# Altium PCB PCB1.PcbDoc
Units mm, origin at the board's own origin, x right, y up, seen from the top; angles counter-clockwise.
Board outline 70 x 56 mm, 2 copper layers (Top Layer, Bottom Layer); 141 components, 90 nets, 390 pads, 43 vias.
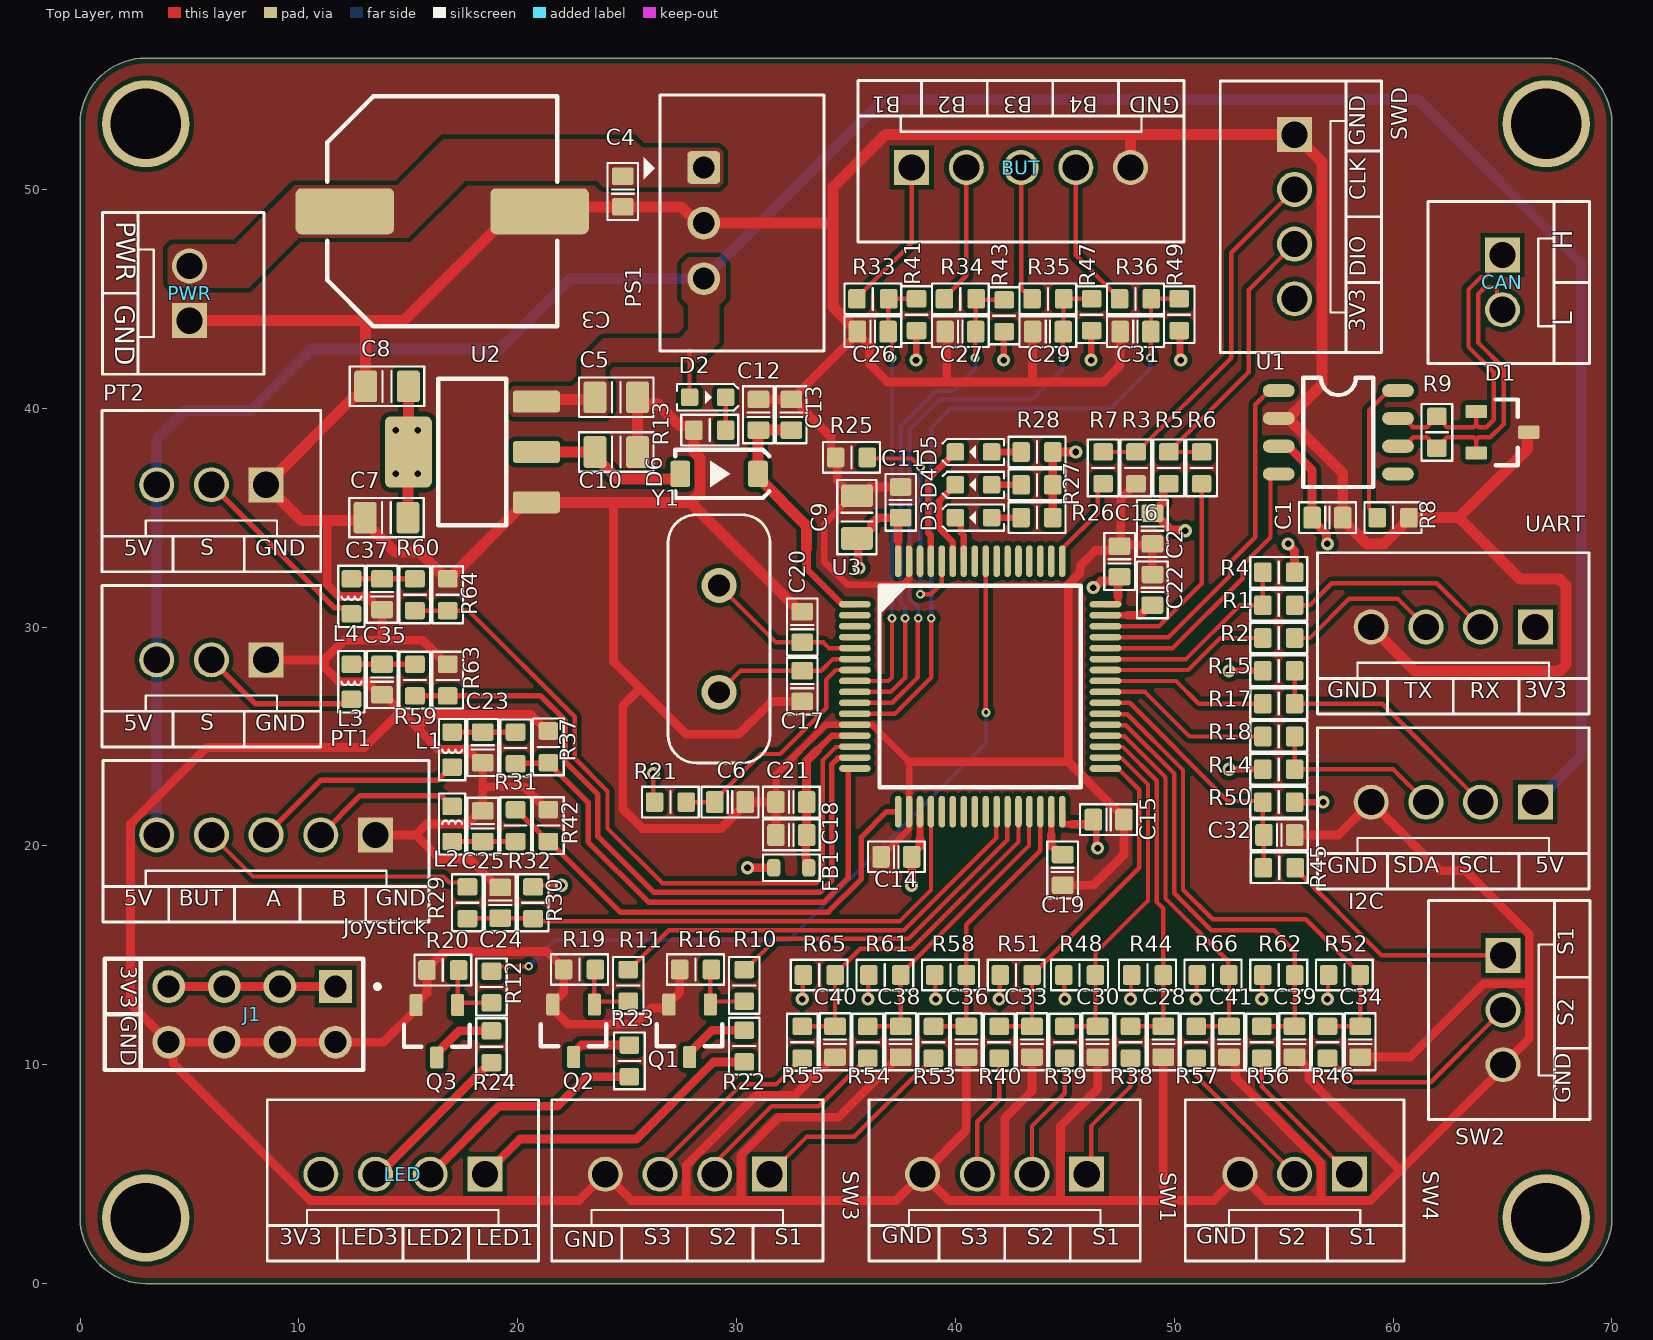
[diagram p0: Top Layer view]
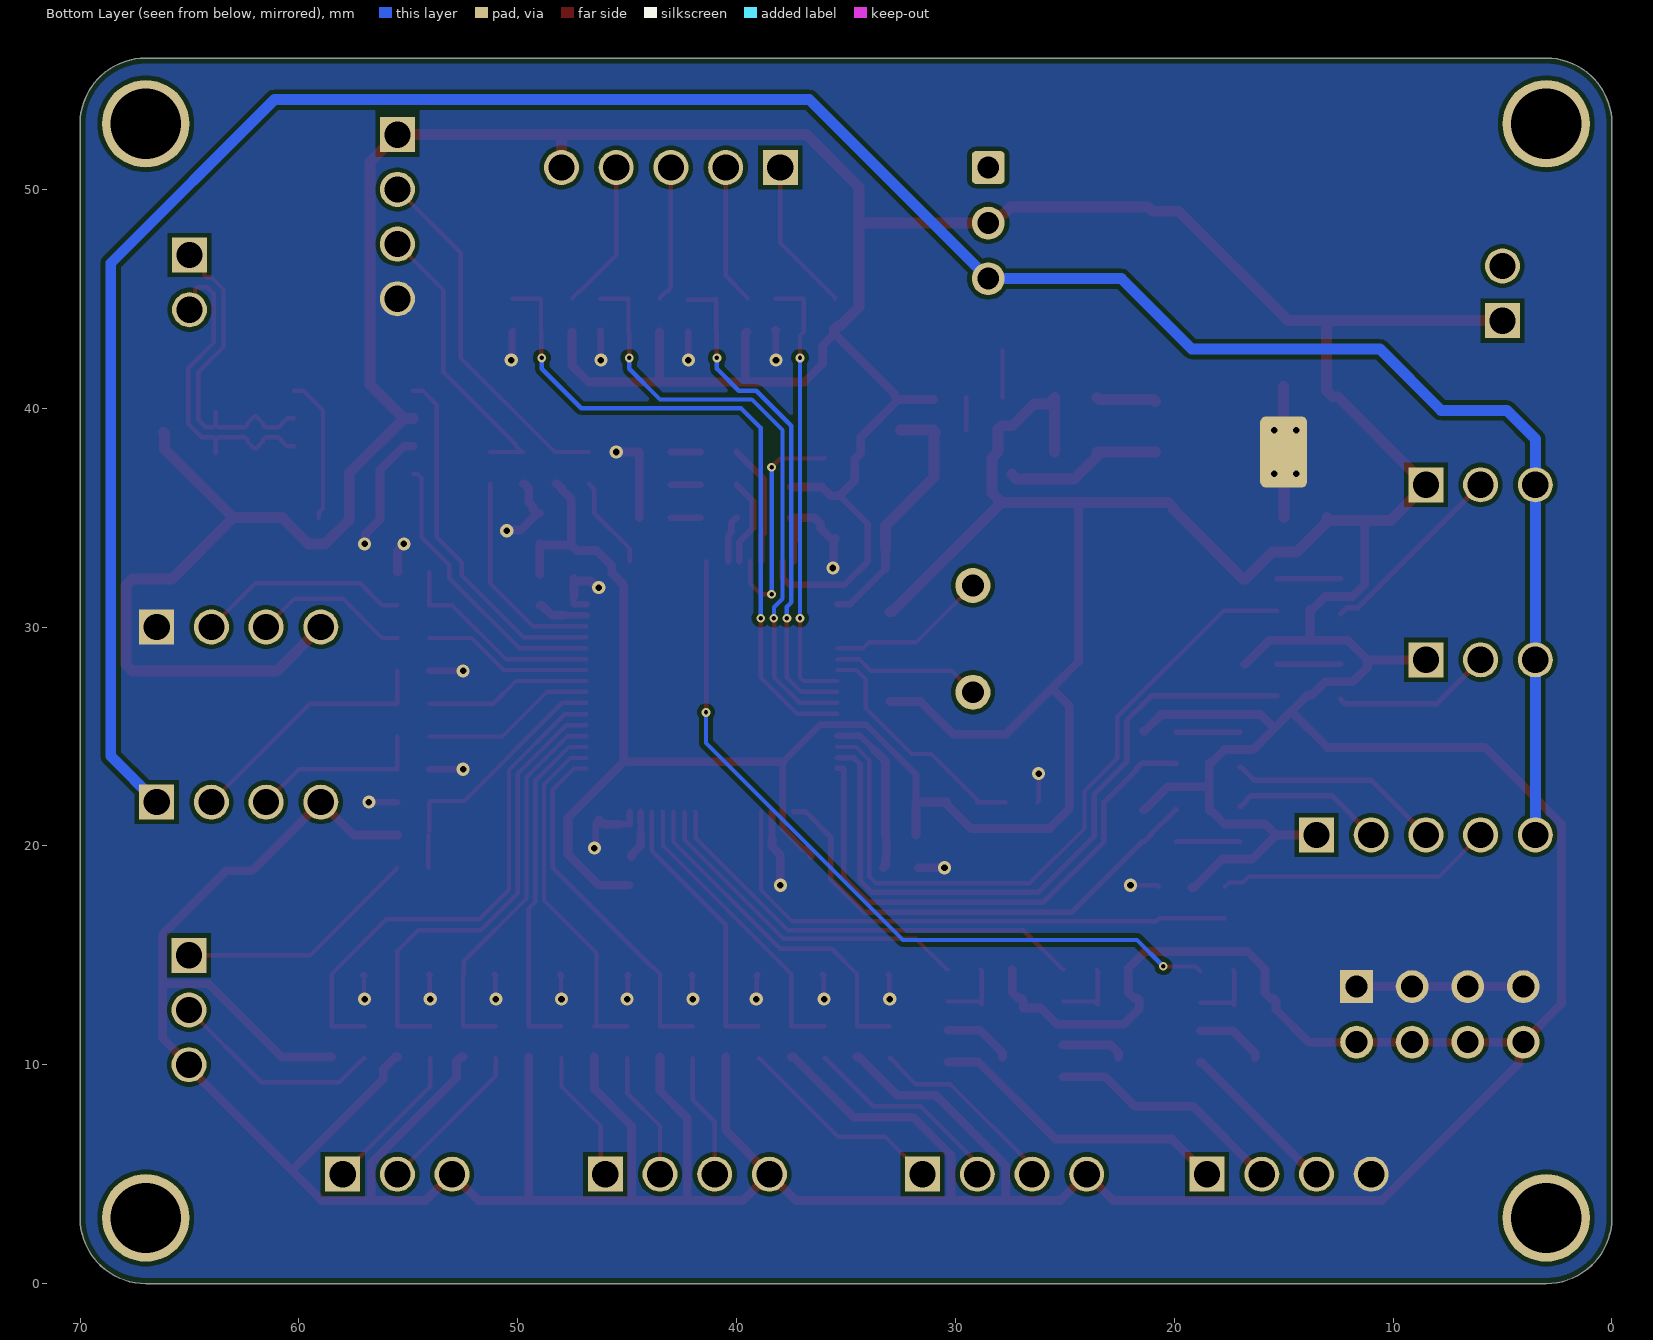
[diagram p1: Bottom Layer view, seen from below]
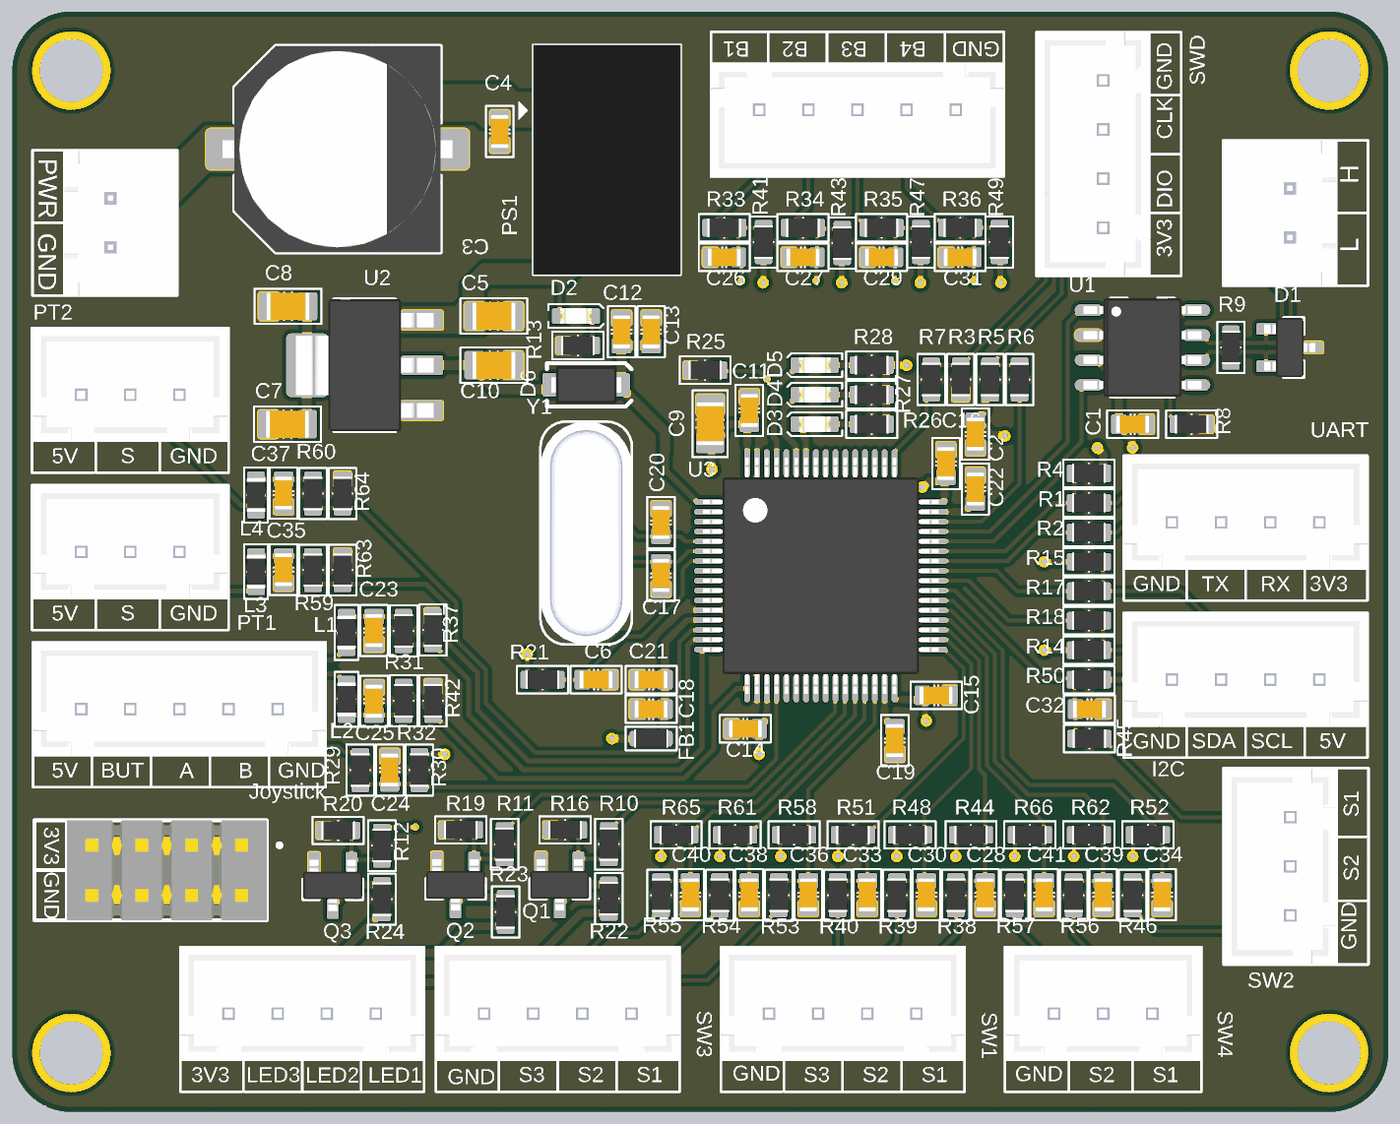
[diagram p2: 3D render of the assembled board from above, using the file's embedded part models]

## Layer stack, top to bottom
Top Solder: solder mask 0.0102, Solder Resist, Dk 3.5
Top Layer: signal copper 0.0356
Dielectric 1: dielectric 0.32, FR-4, Dk 4.8
Bottom Layer: signal copper 0.0356
Bottom Solder: solder mask 0.0102, Solder Resist, Dk 3.5

## Board outline
0,3 0,53 cw(c3,53) 3,56 67,56 cw(c67,53) 70,53 70,3 cw(c67,3) 67,0 3,0 cw(c3,3)

## Design rules (kind name [scope] priority, off if disabled: settings)
AcuteAngle [All] p1: minimum=3.50000000000000E+0001 checktracksonly=FALSE
BoardOutlineClearance "BoardOutlineClearance 1" [All] p1: gap=0.25 ignorepadtopadclearanceinfootprint=FALSE except(0: Arc-SplitContinuation Track-SplitContinuation SMDPad-SplitContinuation THPad-SplitContinuation Via-SplitContinuation Fill-SplitContinuation Poly-SplitContinuation Region-SplitContinuation Text-SplitContinuation) // Milling
BoardOutlineClearance "BoardOutlineClearance 2" [All] p2: gap=0.4 ignorepadtopadclearanceinfootprint=FALSE except(0: Arc-SplitContinuation Track-SplitContinuation SMDPad-SplitContinuation THPad-SplitContinuation Via-SplitContinuation Fill-SplitContinuation Poly-SplitContinuation Region-SplitContinuation Text-SplitContinuation) // V-Cut
Clearance "Clearance-1 1 Oz" [All] p1: gap=0.2 ignorepadtopadclearanceinfootprint=FALSE except(0.25: Arc-Hole Track-Hole SMDPad-Hole THPad-Hole Via-Hole Fill-Hole Poly-Hole Region-Hole Text-Hole) // Standart
Clearance "Clearance 3 Oz" [All] p2: gap=0.35 ignorepadtopadclearanceinfootprint=FALSE except(0.25: Arc-Hole Track-Hole SMDPad-Hole THPad-Hole Via-Hole Fill-Hole Poly-Hole Region-Hole Text-Hole)
Clearance "Clearance 2 Oz" [All] p3: gap=0.3 ignorepadtopadclearanceinfootprint=FALSE except(0.25: Arc-Hole Track-Hole SMDPad-Hole THPad-Hole Via-Hole Fill-Hole Poly-Hole Region-Hole Text-Hole)
Clearance "Clearance-2 1 Oz" [All] p4: gap=0.15 ignorepadtopadclearanceinfootprint=FALSE except(0.2: Arc-Fill Arc-Poly Track-Fill Track-Poly SMDPad-Fill SMDPad-Poly THPad-Fill THPad-Poly Via-Fill Via-Poly Fill-Fill Fill-Poly Poly-Poly; 0.25: Arc-Hole Track-Hole SMDPad-Hole THPad-Hole Via-Hole Fill-Hole Poly-Hole Region-Hole Text-Hole) // Advance
Clearance "Clearance-1 1/2 Oz" [All] p5: gap=0.125 ignorepadtopadclearanceinfootprint=FALSE except(0.2: Arc-Fill Arc-Poly Track-Fill Track-Poly SMDPad-SMDPad SMDPad-Fill SMDPad-Poly THPad-Fill THPad-Poly Via-Fill Via-Poly Fill-Fill Fill-Poly Poly-Poly Poly-Region Poly-Text; 0.25: Arc-Hole Track-Hole SMDPad-Hole THPad-Hole Via-Hole Fill-Hole Poly-Hole Region-Hole Text-Hole) // Standart
Clearance "Clearance-2 1/2 Oz" [All] p6: gap=0.1 ignorepadtopadclearanceinfootprint=FALSE except(0.15: Arc-Fill Arc-Poly Track-Fill Track-Poly SMDPad-SMDPad SMDPad-Fill SMDPad-Poly THPad-Fill THPad-Poly Via-Fill Via-Poly Fill-Fill Fill-Poly Poly-Poly Poly-Region Poly-Text; 0.25: Arc-Hole Track-Hole SMDPad-Hole THPad-Hole Via-Hole Fill-Hole Poly-Hole Region-Hole Text-Hole) // Advance
DiffPairsRouting "DiffPairsRouting 1 Oz" [All] p1: maxlimit=0.254 minlimit=0.2 mostfreqgap=0.254 toplayer_minwidth=0.2 toplayer_maxwidth=0.381 toplayer_prefwidth=0.381 bottomlayer_minwidth=0.2 bottomlayer_maxwidth=0.381 bottomlayer_prefwidth=0.381 maxuncoupledlength=12.7
DiffPairsRouting "DiffPairsRouting 1/2 Oz" [All] p2: maxlimit=0.254 minlimit=0.1 mostfreqgap=0.254 toplayer_minwidth=0.1 toplayer_maxwidth=0.381 toplayer_prefwidth=0.381 bottomlayer_minwidth=0.1 bottomlayer_maxwidth=0.381 bottomlayer_prefwidth=0.381 maxuncoupledlength=12.7
HoleSize "Minimum HoleSize" [IsPad] p1: absolutevalues=TRUE maxlimit=5.9 minlimit=0.6 maxpercent=80.000 minpercent=20.000
HoleSize "Minimum HoleSize VIA 1" [IsVia] p2: absolutevalues=TRUE maxlimit=5.9 minlimit=0.3 maxpercent=80.000 minpercent=20.000 // Standart
HoleSize "Minimum HoleSize VIA 2" [IsVia] p3: absolutevalues=TRUE maxlimit=5.9 minlimit=0.2 maxpercent=80.000 minpercent=20.000 // Advance
HoleToHoleClearance Hole2HoleClearance [All] p1: gap=0.25 allowstackedmicrovias=FALSE
MinimumAnnularRing "Minimum AR VIA Standart" [IsVia] p1: minimumring=0.15
MinimumAnnularRing "Minimum AR PAD Standart" [IsPAD] p2: minimumring=0.2
MinimumAnnularRing "Minimum AR VIA Advance" [IsVia] p3: minimumring=0.1
MinimumAnnularRing "Minimum AR PAD Advance" [IsPAD] p4: minimumring=0.15
MinimumSolderMaskSliver "SolderMask Bridge Standart" [All] p1: minsoldermaskwidth=0.15 // All Masks
MinimumSolderMaskSliver "SolderMask Bridge Advance" [All] p2: minsoldermaskwidth=0.1 // Mask LDI
PlaneClearance "PlaneClearance 3 Oz" [All] p1: clearance=0.35
PlaneClearance "PlaneClearance 2 Oz" [All] p2: clearance=0.3
PlaneClearance "PlaneClearance 1 Oz" [All] p3: clearance=0.2
PlaneClearance "PlaneClearance-1 1/2 Oz" [All] p4: clearance=0.2 // Standart
PlaneClearance "PlaneClearance-2 1/2 Oz" [All] p5: clearance=0.15 // Advance
PlaneConnect "TermalConnect 3 Oz" [All] p1: planeconnectstyle=Relief reliefexpansion=0.2 reliefentries=4 reliefconductorwidth=0.35 reliefairgap=0.35 // Standart
PlaneConnect "TermalConnect 2 Oz" [All] p2: planeconnectstyle=Relief reliefexpansion=0.2 reliefentries=4 reliefconductorwidth=0.3 reliefairgap=0.3 // Standart
PlaneConnect "TermalConnect-1 1 Oz" [All] p3: planeconnectstyle=Relief reliefexpansion=0.2 reliefentries=4 reliefconductorwidth=0.2 reliefairgap=0.2 // Standart
PlaneConnect "TermalConnect-2 1 Oz" [All] p4: pad.planeconnectstyle=Relief pad.reliefexpansion=0.15 pad.reliefentries=4 pad.reliefconductorwidth=0.2 pad.reliefairgap=0.2 via.planeconnectstyle=Direct via.reliefexpansion=0.15 via.reliefentries=4 via.reliefconductorwidth=0.15 via.reliefairgap=0.15 // Advance
PlaneConnect "TermalConnect-1 1/2 Oz" [All] p5: planeconnectstyle=Relief reliefexpansion=0.2 reliefentries=4 reliefconductorwidth=0.2 reliefairgap=0.2 // Standart
PlaneConnect "TermalConnect-2 1/2 Oz" [All] p6: pad.planeconnectstyle=Relief pad.reliefexpansion=0.15 pad.reliefentries=4 pad.reliefconductorwidth=0.15 pad.reliefairgap=0.15 via.planeconnectstyle=Direct via.reliefexpansion=0.15 via.reliefentries=4 via.reliefconductorwidth=0.15 via.reliefairgap=0.15 // Advance
PolygonConnect "PolygonConnect-1 1 Oz" [All] p1: connectstyle=Direct reliefconductorwidth=0.2 reliefentries=4 polygonreliefangle="90 Angle" airgapwidth=0.2 // Standart
PolygonConnect "PolygonConnect 3 Oz" [All] p2: thpad.connectstyle=Relief thpad.reliefconductorwidth=0.35 thpad.reliefentries=4 thpad.polygonreliefangle="90 Angle" thpad.airgapwidth=0.35 smdpad.connectstyle=Relief smdpad.reliefconductorwidth=0.35 smdpad.reliefentries=4 smdpad.polygonreliefangle="90 Angle" smdpad.airgapwidth=0.35 via.connectstyle=Direct via.reliefconductorwidth=0.254 via.reliefentries=4 via.polygonreliefangle="90 Angle" via.airgapwidth=0.254
PolygonConnect "PolygonConnect 2 Oz" [All] p3: thpad.connectstyle=Relief thpad.reliefconductorwidth=0.3 thpad.reliefentries=4 thpad.polygonreliefangle="90 Angle" thpad.airgapwidth=0.3 smdpad.connectstyle=Relief smdpad.reliefconductorwidth=0.3 smdpad.reliefentries=4 smdpad.polygonreliefangle="90 Angle" smdpad.airgapwidth=0.3 via.connectstyle=Direct via.reliefconductorwidth=0.254 via.reliefentries=4 via.polygonreliefangle="90 Angle" via.airgapwidth=0.254
PolygonConnect "PolygonConnect-2 1 Oz" [All] p4: thpad.connectstyle=Relief thpad.reliefconductorwidth=0.15 thpad.reliefentries=4 thpad.polygonreliefangle="90 Angle" thpad.airgapwidth=0.15 smdpad.connectstyle=Relief smdpad.reliefconductorwidth=0.15 smdpad.reliefentries=4 smdpad.polygonreliefangle="90 Angle" smdpad.airgapwidth=0.15 via.connectstyle=Direct via.reliefconductorwidth=0.254 via.reliefentries=4 via.polygonreliefangle="90 Angle" via.airgapwidth=0.254 // Advance
PolygonConnect "PolygonConnect-1 1/2 Oz" [All] p5: thpad.connectstyle=Relief thpad.reliefconductorwidth=0.15 thpad.reliefentries=4 thpad.polygonreliefangle="90 Angle" thpad.airgapwidth=0.2 smdpad.connectstyle=Relief smdpad.reliefconductorwidth=0.2 smdpad.reliefentries=4 smdpad.polygonreliefangle="90 Angle" smdpad.airgapwidth=0.2 via.connectstyle=Direct via.reliefconductorwidth=0.254 via.reliefentries=4 via.polygonreliefangle="90 Angle" via.airgapwidth=0.254 // Standart
PolygonConnect "PolygonConnect-2 1/2 Oz" [All] p6: thpad.connectstyle=Relief thpad.reliefconductorwidth=0.125 thpad.reliefentries=4 thpad.polygonreliefangle="90 Angle" thpad.airgapwidth=0.15 smdpad.connectstyle=Relief smdpad.reliefconductorwidth=0.125 smdpad.reliefentries=4 smdpad.polygonreliefangle="90 Angle" smdpad.airgapwidth=0.15 via.connectstyle=Direct via.reliefconductorwidth=0.254 via.reliefentries=4 via.polygonreliefangle="90 Angle" via.airgapwidth=0.254 // Advance
RoutingCorners [All] p1 off: cornerstyle=45-Degree minsetback=2.54 maxsetback=2.54
RoutingVias [All] p1: holewidth=0.3 width=0.6 viastyle="Through Hole" minholewidth=0.2 minwidth=0.4 maxholewidth=5.9 maxwidth=6.4
SilkToSilkClearance Silk2SilkClearance [All] p1 off: silktosilkclearance=0.15
SilkToSolderMaskClearance Silk2SolderMaskClearance [IsPad] p1 off: minsilkscreentomaskgap=0.15 clearancetoexposedcopper=TRUE
SolderMaskExpansion SolderMaskExpansion-1 [All] p1: expansion=0.05 istentingtop=FALSE // Standart
SolderMaskExpansion "SolderMaskExpansion LDI" [All] p2: expansion=0.025 istentingtop=FALSE // Advance
SupplyNets "Schematic Supply Nets_3" [InNet('5V')] p1: voltage=0.000
SupplyNets "Schematic Supply Nets_2" [InNet('GND')] p2: voltage=0.000
SupplyNets "Schematic Supply Nets_1" [InNet('5-24V')] p3: voltage=0.000
SupplyNets "Schematic Supply Nets" [InNet('3.3V')] p4: voltage=0.000
UnRoutedNet [All] p1: checkbadconnections=TRUE
Width "Width 1 Oz" [All] p1: maxlimit=10 minlimit=0.15 preferedwidth=0.2 checkconnectedcopper=TRUE
Width "Width 3 Oz" [All] p2: maxlimit=10 minlimit=0.35 preferedwidth=0.4 checkconnectedcopper=TRUE
Width "Width 2 Oz" [All] p3: maxlimit=10 minlimit=0.3 preferedwidth=0.35 minimp=50.000000 maximp=50.000000 favimp=50.000000 checkconnectedcopper=TRUE
Width "Width 1/2 Oz" [All] p4: maxlimit=10 minlimit=0.1 preferedwidth=0.125 checkconnectedcopper=TRUE
20 further rules are at their usual default settings.

## Classes and differential pairs
differential pair CAN: +CAN_P -CAN_N

## Components (designator, comment, footprint, x,y, rotation, side; value= is the part's Value field where it differs from the comment)
BUT "B5B-XH-A" JST_B5B-XH-A 43,50.475 r180 top
C1 "0.1uF" "CAP 0603" 57,35 r0 top
C2 "0.1uF" "CAP 0603" 49,34.5 r90 top
C3 "470uF" "ECAP G" 16.55,49 r0 top
C4 "4.7uF" "CAP 0603" 24.8,49.9 r90 top
C5 "22uF" "CAP 0805" 24.5,40.5 r180 top
C6 "0.1uF" "CAP 0603" 29.7,22 r0 top
C7 "22uF" "CAP 0805" 14,35 r0 top
C8 "22uF" "CAP 0805" 14.025,41 r0 top
C9 "10uF" "CAP 0805" 35.5,35.025 r90 top
C10 "22uF" "CAP 0805" 24.5,38 r180 top
C11 "0.1uF" "CAP 0603" 37.5,35.7 r90 top
C12 "0.1uF" "CAP 0603" 31,39.7 r270 top
C13 "2.2uF" "CAP 0603" 32.5,39.7 r90 top
C14 "0.1uF" "CAP 0603" 37.3,19.5 r180 top
C15 "0.1uF" "CAP 0603" 47,21.2 r0 top
C16 "0.1uF" "CAP 0603" 47.5,33 r90 top
C17 "22pF" "CAP 0603" 33,27.3 r90 top
C18 "0.01uF" "CAP 0603" 32.5,20.5 r0 top
C19 "2.2uF" "CAP 0603" 44.9,18.9 r270 top
C20 "22pF" "CAP 0603" 33,30 r270 top
C21 "1uF" "CAP 0603" 32.5,22 r0 top
C22 "2.2uF" "CAP 0603" 49,31.7 r90 top
C23 "0.1uF" "CAP 0603" 18.4,24.5 r90 top
C24 "0.01uF" "CAP 0603" 19.2,17.4 r90 top
C25 "0.1uF" "CAP 0603" 18.4,20.9 r270 top
C26 "0.01uF" "CAP 0603" 36.225,43.5 r0 top
C27 "0.01uF" "CAP 0603" 40.225,43.5 r0 top
C28 "0.01uF" "CAP 0603" 49.5,11.05 r90 top
C29 "0.01uF" "CAP 0603" 44.225,43.5 r0 top
C30 "0.01uF" "CAP 0603" 46.5,11.05 r90 top
C31 "0.01uF" "CAP 0603" 48.225,43.5 r0 top
C32 "0.01uF" "CAP 0603" 54.8,20.5 r180 top
C33 "0.01uF" "CAP 0603" 43.5,11.05 r90 top
C34 "0.01uF" "CAP 0603" 58.5,11.05 r90 top
C35 "0.1uF" "CAP 0603" 13.8,27.6 r90 top
C36 "0.01uF" "CAP 0603" 40.5,11.05 r90 top
C37 "0.1uF" "CAP 0603" 13.8,31.5 r90 top
C38 "0.01uF" "CAP 0603" 37.5,11.05 r90 top
C39 "0.01uF" "CAP 0603" 55.5,11.05 r90 top
C40 "0.01uF" "CAP 0603" 34.5,11.05 r90 top
C41 "0.01uF" "CAP 0603" 52.5,11.05 r90 top
CAN "B2B-XH-A" JST_B2B-XH-A 64.475,45.75 r90 top
D1 "PESD1CAN" SOT23-3 65,38.9 r0 top
D2 "LED 0603" "LED 0603" 28.675,40.5 r180 top
D3 "LED 0603" "LED 0603" 40.825,35 r0 top
D4 "LED 0603" "LED 0603" 40.825,36.5 r0 top
D5 "LED 0603" "LED 0603" 40.825,38 r0 top
D6 "SM5819PL" SOD-123FL 29.2,37 r0 top
FB1 "Ferrite bead 0603" "Ferrite bead 0603" 32.5,19 r180 top
I2C "B4B-XH-A" JST_B4B-XH-A 62.75,22.525 r0 top
J1 "Pin Header 2x4" "Pin Header 2x4" 7.858,12.301 r180 top
Joystick "B5B-XH-A" JST_B5B-XH-A 8.5,21.025 r0 top
L1 "10uH" "L 0603" 17,24.4 r90 top
L2 "10uH" "L 0603" 17,21 r270 top
L3 "10uH" "L 0603" 12.4,27.5 r90 top
L4 "10uH" "L 0603" 12.4,31.4 r90 top
LED "B4B-XH-A" JST_B4B-XH-A 14.75,5.525 r0 top
PS1 "TSR 1-2450" SIP3 30.25,48.46 r270 top
PT1 "B3B-XH-A" JST_B3B-XH-A 6,29.025 r0 top
PT2 "B3B-XH-A" JST_B3B-XH-A 6,37.025 r0 top
PWR "B2B-XH-A" JST_B2B-XH-A 5.525,45.25 r270 top
Q1 "MMFTN20" SOT23-3 27.85,11.55 r270 top
Q2 "MMFTN20" SOT23-3 22.55,11.55 r270 top
Q3 "MMFTN20" SOT23-3 16.3,11.525 r270 top
R1 "100" "RES 0603" 54.775,31 r180 top
R2 "100" "RES 0603" 54.775,29.5 r180 top
R3 "10k" "RES 0603" 48.25,37.275 r90 top
R4 "10k" "RES 0603" 54.775,32.5 r0 top
R5 "10k" "RES 0603" 49.75,37.275 r270 top
R6 "22" "RES 0603" 51.25,37.275 r270 top
R7 "22" "RES 0603" 46.75,37.275 r270 top
R8 "10k" "RES 0603" 60,35 r0 top
R9 "120" "RES 0603" 62,38.9 r270 top
R10 "150" "RES 0603" 30.35,13.625 r90 top
R11 "150" "RES 0603" 25.05,13.625 r90 top
R12 "150" "RES 0603" 18.8,13.55 r90 top
R13 "150" "RES 0603" 28.775,39 r0 top
R14 "4.7k" "RES 0603" 54.775,23.5 r180 top
R15 "4.7k" "RES 0603" 54.775,28 r180 top
R16 "10k" "RES 0603" 28.125,14.35 r0 top
R17 "100" "RES 0603" 54.775,26.5 r180 top
R18 "100" "RES 0603" 54.775,25 r180 top
R19 "10k" "RES 0603" 22.825,14.35 r0 top
R20 "10k" "RES 0603" 16.575,14.325 r0 top
R21 "10k" "RES 0603" 26.975,22 r0 top
R22 "470" "RES 0603" 30.35,10.85 r90 top
R23 "470" "RES 0603" 25.1,10.175 r90 top
R24 "470" "RES 0603" 18.8,10.825 r270 top
R25 "10k" "RES 0603" 35.25,37.75 r180 top
R26 "470" "RES 0603" 43.725,35 r0 top
R27 "470" "RES 0603" 43.725,36.5 r0 top
R28 "470" "RES 0603" 43.725,38 r0 top
R29 "1k" "RES 0603" 17.7,17.4 r270 top
R30 "10k" "RES 0603" 20.7,17.4 r90 top
R31 "10k" "RES 0603" 19.9,24.475 r270 top
R32 "10k" "RES 0603" 19.9,20.925 r90 top
R33 "1k" "RES 0603" 36.225,45 r0 top
R34 "1k" "RES 0603" 40.225,45 r0 top
R35 "1k" "RES 0603" 44.225,45 r0 top
R36 "1k" "RES 0603" 48.225,45 r0 top
R37 "18k" "RES 0603" 21.4,24.525 r270 top
R38 "1k" "RES 0603" 48,11.025 r90 top
R39 "1k" "RES 0603" 45,11.025 r90 top
R40 "1k" "RES 0603" 42,11.025 r90 top
R41 "10k" "RES 0603" 38.225,44.275 r270 top
R42 "18k" "RES 0603" 21.4,20.925 r270 top
R43 "10k" "RES 0603" 42.225,44.225 r270 top
R44 "10k" "RES 0603" 48.775,14.1 r180 top
R45 "1k" "RES 0603" 54.8,19 r180 top
R46 "1k" "RES 0603" 57,11.025 r90 top
R47 "10k" "RES 0603" 46.225,44.275 r270 top
R48 "10k" "RES 0603" 45.675,14.1 r180 top
R49 "10k" "RES 0603" 50.225,44.275 r270 top
R50 "10k" "RES 0603" 54.775,22 r0 top
R51 "10k" "RES 0603" 42.775,14.1 r180 top
R52 "10k" "RES 0603" 57.775,14.1 r180 top
R53 "1k" "RES 0603" 39,11.025 r90 top
R54 "1k" "RES 0603" 36,11.025 r90 top
R55 "1k" "RES 0603" 33,11.025 r90 top
R56 "1k" "RES 0603" 54,11.025 r90 top
R57 "1k" "RES 0603" 51,11.025 r90 top
R58 "10k" "RES 0603" 39.775,14.1 r180 top
R59 "10k" "RES 0603" 15.3,27.575 r270 top
R60 "10k" "RES 0603" 15.3,31.475 r270 top
R61 "10k" "RES 0603" 36.775,14.1 r180 top
R62 "10k" "RES 0603" 54.775,14.1 r180 top
R63 "18k" "RES 0603" 16.8,27.575 r270 top
R64 "18k" "RES 0603" 16.8,31.475 r270 top
R65 "10k" "RES 0603" 33.775,14.1 r180 top
R66 "10k" "RES 0603" 51.775,14.1 r180 top
SW1 "B4B-XH-A" JST_B4B-XH-A 42.25,5.525 r0 top
SW2 "B3B-XH-A" JST_B3B-XH-A 64.5,12.5 r90 top
SW3 "B4B-XH-A" JST_B4B-XH-A 27.75,5.525 r0 top
SW4 "B3B-XH-A" JST_B3B-XH-A 55.5,5.525 r0 top
SWD "B4B-XH-A" JST_B4B-XH-A 54.975,48.75 r90 top
U1 "SN65HVD230D" SOIC8 57.5,38.9 r0 top
U2 "LD1117S33TR" SOT223 17.925,38 r180 top
U3 "STM32F405RGT6" LQFP64 41.132,27.287 r0 top locked
UART "B4B-XH-A" JST_B4B-XH-A 62.75,30.525 r0 top
Y1 "8MHz" HC-49S 29.2,29.46 r90 top

## Footprints (in the part's own frame and the unit in brackets; to place one, negate y for a bottom-side part, rotate by r counter-clockwise, add the part's x,y. Pads: shape width x height; smd on the part's side, far side on the other; paste and mask are expansions set on the pad)
"CAP 0603" [mm] "Chip Capacitor, 2-Leads, Body 1.60x0.80mm, IPC Medium Density"
  rrect25% 0.8x1 smd: 1(-0.7,0) 2(0.7,0)
  silkscreen extent -1.3,-0.7 1.3,0.7, body extent -0.85,-0.45 0.85,0.45, height 0.95
"CAP 0805" [mm] "Chip Capacitor, 2-Leads, Body 2.05x1.25mm, IPC Medium Density"
  rrect25% 1.05x1.45 smd: 1(-0.975,0) 2(0.975,0)
  silkscreen extent -1.7,-0.9 1.7,0.9, body extent -1.1,-0.7 1.1,0.7, height 0.5
"ECAP G" [mm] "Aluminum Electrolytic Capacitor, Body 10.30x10.30x10.00mm, IPC Medium Density"
  rrect25% 4.5x2.1 smd: 1(-4.45,0) 2(4.45,0)
  silkscreen extent -5.25,-5.25 5.25,5.25, body extent -5.85,-5.25 5.85,5.25, height 10
"Ferrite bead 0603" [mm] "Chip Inductor, 2-Leads, Body 1.60x0.80mm, IPC Medium Density"
  rrect50% 0.6x0.8 smd: 1(-0.8,0) 2(0.8,0)
  silkscreen extent -1.3,-0.6 1.3,0.6, body extent -0.87,-0.48 0.87,0.48, height 0.75
HC-49S [mm]
  round 1.6 hole 1: 1(-2.44,0) 2(2.44,0)
  silkscreen extent -5.68,-2.33 5.68,2.33, body extent -5.68,-2.32 5.68,2.32, height 3.5
JST_B2B-XH-A [mm]
  rect 1.6x1.6 hole 1.2: 1(1.25,-0.525)
  round 1.6 hole 1.2: 2(-1.25,-0.525)
  silkscreen extent -3.7,-4.5 3.7,2.88, body extent -3.7,-2.88 3.7,2.88, height 7
JST_B3B-XH-A [mm]
  rect 1.6x1.6 hole 1.2: 1(2.5,-0.525)
  round 1.6 hole 1.2: 2(0,-0.525) 3(-2.5,-0.525)
  silkscreen extent -5,-4.5 5,2.88, body extent -4.95,-2.88 4.95,2.88, height 7
JST_B4B-XH-A [mm]
  rect 1.6x1.6 hole 1.2: 1(3.75,-0.525)
  round 1.6 hole 1.2: 2(1.25,-0.525) 3(-1.25,-0.525) 4(-3.75,-0.525)
  silkscreen extent -6.2,-4.5 6.2,2.88, body extent -6.2,-2.88 6.2,2.88, height 7
JST_B5B-XH-A [mm]
  rect 1.6x1.6 hole 1.2: 1(5,-0.525)
  round 1.6 hole 1.2: 2(2.5,-0.525) 3(0,-0.525) 4(-2.5,-0.525) 5(-5,-0.525)
  silkscreen extent -7.45,-4.5 7.45,2.88, body extent -7.45,-2.88 7.45,2.88, height 7
"L 0603" [mm] "Chip Inductor, 2-Leads, Body 1.60x0.80mm, IPC Medium Density"
  rrect25% 0.8x0.9 smd: 1(-0.8,0) 2(0.8,0)
  silkscreen extent -1.4,-0.6 1.4,0.6, body extent -0.87,-0.48 0.87,0.48, height 0.95
"LED 0603" [mm]
  rrect25% 0.8x0.8 smd: 1(0.825,0) 2(-0.825,0)
  silkscreen extent -1.4,-0.6 1.4,0.6, body extent -0.8,-0.4 0.8,0.4, height 0.55
LQFP64 [mm] "SQFP, 64-Leads, Body 10.00x10.00mm, Pitch 0.50mm, IPC Medium Density"
  oval 1.45x0.3 smd mask+0.05: 1(-5.725,3.75) 2(-5.725,3.25) 3(-5.725,2.75) 4(-5.725,2.25) 5(-5.725,1.75) 6(-5.725,1.25) 7(-5.725,0.75) 8(-5.725,0.25) 9(-5.725,-0.25) 10(-5.725,-0.75) 11(-5.725,-1.25) 12(-5.725,-1.75) 13(-5.725,-2.25) 14(-5.725,-2.75) 15(-5.725,-3.25) 16(-5.725,-3.75) 33(5.725,-3.75) 34(5.725,-3.25) 35(5.725,-2.75) 36(5.725,-2.25) 37(5.725,-1.75) 38(5.725,-1.25) 39(5.725,-0.75) 40(5.725,-0.25) 41(5.725,0.25) 42(5.725,0.75) 43(5.725,1.25) 44(5.725,1.75) 45(5.725,2.25) 46(5.725,2.75) 47(5.725,3.25) 48(5.725,3.75)
  oval 0.3x1.45 smd mask+0.05: 17(-3.75,-5.725) 18(-3.25,-5.725) 19(-2.75,-5.725) 20(-2.25,-5.725) 21(-1.75,-5.725) 22(-1.25,-5.725) 23(-0.75,-5.725) 24(-0.25,-5.725) 25(0.25,-5.725) 26(0.75,-5.725) 27(1.25,-5.725) 28(1.75,-5.725) 29(2.25,-5.725) 30(2.75,-5.725) 31(3.25,-5.725) 32(3.75,-5.725) 49(3.75,5.725) 50(3.25,5.725) 51(2.75,5.725) 52(2.25,5.725) 53(1.75,5.725) 54(1.25,5.725) 55(0.75,5.725) 56(0.25,5.725) 57(-0.25,5.725) 58(-0.75,5.725) 59(-1.25,5.725) 60(-1.75,5.725) 61(-2.25,5.725) 62(-2.75,5.725) 63(-3.25,5.725) 64(-3.75,5.725)
  silkscreen extent -4.6,-4.6 4.6,4.6, body extent -6,-6 6,6, height 1.7
"Pin Header 2x4" [mm]
  rect 1.5x1.5 hole 1: 1(-3.81,-1.27)
  round 1.5 hole 1: 2(-3.81,1.27) 3(-1.27,-1.27) 4(-1.27,1.27) 5(1.27,-1.27) 6(1.27,1.27) 7(3.81,-1.27) 8(3.81,1.27)
  silkscreen extent -5.83,-2.54 5.08,2.54, body extent -5.08,-2.54 5.08,2.54, height 8.64
"RES 0603" [mm] "Chip Resistor, 2-Leads, Body 1.60x0.85mm, IPC Medium Density"
  rrect25% 0.8x0.9 smd: 1(-0.725,0) 2(0.725,0)
  silkscreen extent -1.3,-0.7 1.3,0.7, body extent -0.85,-0.48 0.85,0.48, height 0.5
SIP3 [mm]
  rrect25% 1.5x1.5 hole 1: 1(-2.54,-1.75)
  round 1.5 hole 1: 2(0,-1.75) 3(2.54,-1.75)
  silkscreen extent -5.85,-4.5 5.85,3.75, body extent -5.85,-3.75 5.85,3.75, height 10.13
SOD-123FL [mm] "SODFL, 2-Leads, Body 1.65x3.58mm, IPC Medium Density"
  rrect25% 0.9x1.2 smd: 1(-1.775,0) 2(1.775,0)
  silkscreen extent -2,-1.1 2.3,1.1, body extent -1.79,-0.95 1.79,0.95, height 1.35
SOIC8 [mm] "SOIC, 8-Leads, Body 4.90x3.90mm, Pitch 1.27mm, IPC Medium Density"
  oval 1.45x0.6 smd: 1(-2.725,1.905) 2(-2.725,0.635) 3(-2.725,-0.635) 4(-2.725,-1.905) 5(2.725,-1.905) 6(2.725,-0.635) 7(2.725,0.635) 8(2.725,1.905)
  silkscreen extent -1.6,-2.5 1.6,2.5, body extent -3,-2.5 3,2.5, height 1.75
SOT23-3 [mm] "SOT23, 3-Leads, Body 2.90x2.45mm, Pitch 0.95mm, IPC Medium Density"
  rrect25% 1x0.6 smd: 1(-1.2,0.95) 2(-1.2,-0.95) 3(1.2,0)
  silkscreen extent -0.3,-1.5 0.7,1.5, body extent -1.3,-1.5 1.3,1.5, height 1.1
SOT223 [mm] "SOT223, 4-Leads, Body 6.50x7.00mm (avg), Pitch 2.30mm, IPC Medium Density"
  rrect25% 2.15x1 smd: 1(-2.925,2.3) 2(-2.925,0) 3(-2.925,-2.3)
  rrect25% 2.15x3.25 smd: 4(2.925,0)
  rrect25% 2.15x3.25 smd far side: 4(2.925,0)
  silkscreen extent -1.55,-3.35 1.55,3.35, body extent -3.5,-3.35 3.5,3.35, height 1.8

## Part data
BUT Joystick: "Connector Header Through Hole 5 position 0.098 (2.50mm)", Package=None, Check_prices=https://www.snapeda.com/parts/B5B-XH-A/JST+Sales+America+Inc./view-part/?ref=eda, MF="JST Sales", MP=B5B-XH-A, SnapEDA_Link=https://www.snapeda.com/parts/B5B-XH-A/JST+Sales+America+Inc./view-part/?ref=snap
C1 C2 C4 C6 C11 C12 C13 C14 C15 C16 C17 C18 C19 C20 C21 C22 C23 C24 C25 C26 C27 C28 C29 C30 C31 C32 C33 C34 C35 C36 C37 C38 C39 C40 C41: library part "CAP 0603"
C3: library part ECAP
C5 C7 C8 C9 C10: library part "CAP 0805"
CAN PWR: "Connector Header Through Hole 2 position 0.098 (2.50mm)", Package=None, Check_prices=https://www.snapeda.com/parts/B2B-XH-A(LF)(SN)/JST/view-part/?ref=eda, MF="JST Sales", MP=B2B-XH-A(LF)(SN), SnapEDA_Link=https://www.snapeda.com/parts/B2B-XH-A(LF)(SN)/JST/view-part/?ref=snap
D1: "50V Clamp 3A (8/20Âµs) Ipp Tvs Diode Surface Mount SOT-323", Package="SOT-23-3 NXP Semiconductors", Check_prices=https://www.snapeda.com/parts/PESD1CAN/Nexperia/view-part/?ref=eda, MF="Nexperia USA", MP=PESD1CAN, SnapEDA_Link=https://www.snapeda.com/parts/PESD1CAN/Nexperia/view-part/?ref=snap
D2 D3 D4 D5: "Green 560nm LED Indication - Discrete 2.2V 0603 (1608 Metric)", Package="0603 Rohm", Check_prices=https://www.snapeda.com/parts/SML-D12P8WT86/Rohm/view-part/?ref=eda, MF=Rohm, MP=SML-D12P8WT86, SnapEDA_Link=https://www.snapeda.com/parts/SML-D12P8WT86/Rohm/view-part/?ref=snap
D6: "Schottky Diode, 40V, 1A"
I2C LED SW1 SW3 SWD UART: "Connector Header Through Hole 4 position 0.098 (2.50mm)", Package=None, Check_prices=https://www.snapeda.com/parts/B4B-XH-A/JST/view-part/?ref=eda, MF="JST Sales", MP=B4B-XH-A, SnapEDA_Link=https://www.snapeda.com/parts/B4B-XH-A/JST/view-part/?ref=snap
J1: "Connector Header Through Hole 8 position 0.100 (2.54mm)", Package=None, Check_prices=https://www.snapeda.com/parts/MTSW-104-07-T-D-240-LL/Samtec/view-part/?ref=eda, MF=Samtec, MP=MTSW-104-07-T-D-240-LL, SnapEDA_Link=https://www.snapeda.com/parts/MTSW-104-07-T-D-240-LL/Samtec/view-part/?ref=snap
L1 L2 L3 L4: library part "L 0603"
PS1: Package=None, Availability=Unavailable, MF="Traco Power", MP=TSR_1-2450, Price=None
PT1 PT2 SW2 SW4: "Connector Header Through Hole 3 position 0.098 (2.50mm)", Package=None, Check_prices=https://www.snapeda.com/parts/B3B-XH-A/JST+Sales+America+Inc./view-part/?ref=eda, MF="JST Sales", MP=B3B-XH-A, SnapEDA_Link=https://www.snapeda.com/parts/B3B-XH-A/JST+Sales+America+Inc./view-part/?ref=snap
Q1 Q2 Q3: "MOSFET, SOT-23, N, 50V, 0.1A, 15â„", Package="SOT-23 Diotec", Check_prices=https://www.snapeda.com/parts/MMFTN20/Diotec/view-part/?ref=eda, MF="Diotec Semiconductor", MP=MMFTN20, SnapEDA_Link=https://www.snapeda.com/parts/MMFTN20/Diotec/view-part/?ref=snap
R1 R2 R3 R4 R5 R6 R7 R8 R9 R10 R11 R12 R13 R14 R15 R16 R17 R18 R19 R20 R21 R22 R23 R24 R25 R26 R27 R28 R29 R30 R31 R32 R33 R34 R35 R36 R37 R38 R39 R40 R41 R42 R43 R44 R45 R46 R47 R48 R49 R50 R51 R52 R53 R54 R55 R56 R57 R58 R59 R60 R61 R62 R63 R64 R65 R66: library part "RES 0603"
U1: "TI, 1/1 Transceiver Half CANbus 8-SO()", Part=SN65HVD230D
U2: "Linear Voltage Regulator IC Positive Fixed 1 Output 800mA SOT-223", Package="TO-261-4 STMicroelectronics", Availability="In Stock", Check_prices=https://www.snapeda.com/parts/LD1117S33TR/STMicroelectronics/view-part/?ref=eda, MF=STMicroelectronics, MP=LD1117S33TR, Price=None, Purchase-URL=https://pricing.snapeda.com/search/part/LD1117S33TR/?ref=eda, SnapEDA_Link=https://www.snapeda.com/parts/LD1117S33TR/STMicroelectronics/view-part/?ref=snap
U3: "ARM CortexA-M4 STM32F4 Microcontroller IC 32-Bit Single-Core 168MHz 1MB (1M x 8) FLASH 64-LQFP (10x10)", Package="LQFP-64 STMicroelectronics", Check_prices=https://www.snapeda.com/parts/STM32F405RGT6/STMicroelectronics/view-part/?ref=eda, MF=STMicroelectronics, MP=STM32F405RGT6, SnapEDA_Link=https://www.snapeda.com/parts/STM32F405RGT6/STMicroelectronics/view-part/?ref=snap
Y1: library part SJK-6B-8.000-16-30-50-C-50-H, "Crystals 8MHz HC49S", Package="HC-49US ECS Inc.", Check_prices=https://www.snapeda.com/parts/ECS-17.1776-20-4/ECS/view-part/?ref=eda, MF="ECS International", MP=ECS-17.1776-20-4, SnapEDA_Link=https://www.snapeda.com/parts/ECS-17.1776-20-4/ECS/view-part/?ref=snap

## Free pads (board coordinates)
  round 4 hole 3.2 unplated: MH(3,3) MH(3,53) MH(67,3) MH(67,53)

## Via types
v1: diameter 0.6/0.6 (per signal layer), hole 0.3, Top Layer to Bottom Layer, 27 vias
v2: diameter 0.4, hole 0.2, Top Layer to Bottom Layer, 12 vias
v3: diameter 0.6, hole 0.3, Top Layer to Bottom Layer, 4 vias

## Nets (pads, with @x,y where several pads share a name; then routed paths per layer and width w, separated by ;. In a path a pad name is that pad's centre, name@x,y a point inside that pad or via, vN(x,y) a via of type N, cw(c..) or ccw(c..) an arc to the next point about the centre after c; other vN are vias at no path point)
3.3V: C1.1 C2.2 C7.2 C8.2 C9.1 C10.2 C11.1 C14.1 C15.1 C16.1 D6.1 FB1.2 J1.1 J1.3 J1.5 J1.7 LED.4 R4.2 R5.2 R14.2 R15.2 R21.1 R26.2 R27.2 R28.2 R30.2 R41.2 R43.2 R44.2 R47.2 R48.2 R49.2 R50.2 R51.2 R52.2 R58.2 R61.2 R62.2 R65.2 R66.2 SWD.4 U1.3 U2.2 U2.4 U3.19 U3.32 U3.48 U3.64 UART.1 | length 75
  Top Layer w0.2: R30.2 20.775,18.2 v1(22,18.2) ; v1(26.2,23.3) 26.2,22.05 R21.1 ; v1@33.025,13.025 R65.2@33.025,14.075 ; v1@36.025,13.025 R61.2@36.025,14.075 ; v1@39.075,13.025 R58.2@39.075,14.075 ; v1@42.025,13.025 R51.2@42.025,14.075 ; v1@44.975,13.025 R48.2@44.975,14.075 ; v1@48.025,13.025 R44.2@48.025,14.075 ; v1@51.025,13.025 R66.2@51.025,14.075 ; v1@54.025,13.025 R62.2@54.025,14.075 ; v1@57.025,13.025 R52.2@57.025,14.075
  Top Layer w0.3: v1(33,13) v1@33.025,13.025 ; R65.2@33.025,14.075 R65.2 ; v1(36,13) v1@36.025,13.025 ; R61.2@36.025,14.075 R61.2 ; U3.64 37.382,33.982 ; v1@38.212,42.212 R41.2@38.212,43.537 ; 38.382,20.3 U3.19 ; R58.2 R58.2@39.075,14.075 ; v1@39.075,13.025 v1(39.1,13) ; v1(42,13) v1@42.025,13.025 ; R51.2@42.025,14.075 R51.2 ; v1(42.2,42.2) 42.212,42.212 42.212,43.487 R43.2 ; U3.32 44.882,20.987 45.313,20.987 ; R48.2 R48.2@44.975,14.075 ; v1@44.975,13.025 v1(45,13) ; v1(46.2,42.2) 46.212,42.212 46.212,43.537 R47.2 ; C15.1@46.3,21.187 46.443,21.044 46.443,19.957 v1(46.5,19.9) ; U3.48 47.432,31.037 47.432,31.4 ; v1(48,13) v1@48.025,13.025 ; R44.2@48.025,14.075 R44.2 ; R49.2 50.263,43.512 50.263,42.237 v1(50.3,42.2) ; v1(51,13) v1@51.025,13.025 ; R66.2@51.025,14.075 R66.2 ; v1(52.5,23.5) R14.2 ; v1(52.5,28) R15.2 ; v1(54,13) v1@54.025,13.025 ; R62.2@54.025,14.075 R62.2 ; R50.2 v1(56.8,22) ; v1(57,13) v1@57.025,13.025 ; R52.2@57.025,14.075 R52.2
  Top Layer w0.4: J1.7 J1.1 ; v1(30.5,19) FB1.2 ; C9.1 35.562,33.988 35.562,32.738 v1(35.6,32.7) ; C9.1@35.7,34.05 36.157,34.507 36.157,34.707 36.45,35 C11.1 37.382,34.882 37.382,33.982 ; v1(38,18.2) C14.1 ; C14.1@38,19.6 38.382,19.982 38.382,20.3 ; v1(38.2,42.2) v1@38.212,42.212 ; R41.2@38.212,43.537 R41.2 ; R26.2 R27.2 R28.2 v1(45.5,38) ; 45.313,20.987 46.1,20.987 C15.1@46.3,21.187 ; v1(46.3,31.8) 46.354,31.8 46.654,32.1 47.3,32.1 47.432,32.232 47.432,31.4 ; C2.2 C2.2@49.1,35.2 ; R5.2 49.7,36.55 49.5,36.35 49.5,35.7 49.3,35.5 49.3,35.4 C2.2@49.1,35.2 ; v1(50.5,34.4) 50.462,34.438 49.862,34.438 C2.2@49.1,35.2 ; U1.3 55.2,38.265 56.3,37.165 C1.1 56.3,34.9 56.962,34.238 56.962,33.838 v1(57,33.8) ; v1(55.2,33.8) 55.2,33.773 55.5,33.473 R4.2
  Top Layer w0.5: C7.2 14.988,35.012 14.988,37.988 15,38 C8.2 ; U2.2 C10.2 23.525,37.8 24.55,36.775 27.225,36.775 27.425,36.975 D6.1
  other v3: 14.425,37 15.425,37 14.425,39 15.425,39
5-24V: C3.1 C4.2 PS1.1 PWR.2
5V: C5.2 D2.1 I2C.1 Joystick.5 PS1.3 PT1.3 PT2.3 U2.3 | length 123.1
  Top Layer w0.2: D2.1 27.85,42.65
  Top Layer w0.5: U2.3 20.95,40.4 23.425,40.4 C5.2
  Bottom Layer w0.5: Joystick.5 PT1.3 PT2.3 3.5,38.6 4.8,39.9 7.8,39.9 10.6,42.7 19.2,42.7 22.42,45.92 PS1.3 36.68,54.1 61.124,54.1 68.6,46.624 68.6,24.1 I2C.1
ADC1_JK_A: R31.2 R37.2 U3.16 | length 24.7
  Top Layer w0.25: R31.2 19.925,23.775 21.375,23.775 R37.2 ; R37.2@21.45,23.8 21.725,23.525 21.725,23.475 23.213,21.987 23.213,20.187 25.975,17.425 33.999,17.425 35.1,18.526 35.1,23.514 35.123,23.537 U3.16
ADC1_JK_B: R32.2 R42.2 U3.17 | length 22.4
  Top Layer w0.25: R32.2 19.95,21.65 21.075,20.525 21.075,20.475 21.35,20.2 R42.2 ; R42.2@21.45,20.2 24.675,16.975 34.185,16.975 35.7,18.49 35.7,20.405 36.857,21.562 U3.17
ADC1_PT_1: R60.2 R64.2 U3.14 | length 33.1
  Top Layer w0.2: R60.2 R64.2 17.752,30.75 22.6,25.902 22.6,24.001 24.1,22.501 24.1,20.8 26.6,18.3 33.636,18.3 33.932,18.596 33.932,23.91 33.972,23.95 34.54,24.518 35.388,24.518 U3.14
ADC1_PT_2: R59.2 R63.2 U3.15 | length 31.7
  Top Layer w0.25: R59.2 R63.2 ; R63.2@16.85,26.85 21.051,26.85 22.175,25.726 22.175,23.825 23.663,22.338 23.663,20.437 26.225,17.875 33.812,17.875 34.357,18.42 34.357,23.734 34.651,24.027 35.397,24.027 U3.15
BOOT: R25.1 U3.60 | length 10.6
  Top Layer w0.2: R25.1 36.025,37.7 38,37.7 v2(38.4,37.3) ; v2(38.4,31.5) 38.405,31.505 38.9,31.505 39.382,31.987 U3.60
  Bottom Layer w0.2: v2(38.4,31.5) v2(38.4,37.3)
BUTTON_1: C26.2 R33.2 R41.1 U3.8 | length 20.4
  Top Layer w0.2: U3.8 36.937,27.537 37.1,27.7 v2(37.1,30.4) ; v2(37.1,42.3) 37.1,43.325 C26.2 36.938,43.513 36.938,44.987 R33.2 R41.1
  Bottom Layer w0.2: v2(37.1,30.4) v2(37.1,42.3)
BUTTON_2: C27.2 R34.2 R43.1 U3.9 | length 23.2
  Top Layer w0.2: U3.9 37.049,27.037 37.7,27.688 v2(37.7,30.4) ; v2(40.9,42.3) 40.9,43.475 C27.2 40.937,43.512 40.937,44.987 R34.2 41,44.95 R43.1
  Bottom Layer w0.2: v2(37.7,30.4) 37.7,30.927 37.5,31.127 37.5,33.177 37.5,39.2 39.1,40.8 39.9,40.8 40.9,41.8 v2(40.9,42.3)
BUTTON_3: C29.2 R35.2 R47.1 U3.10 | length 27.5
  Top Layer w0.2: U3.10 37.114,26.537 38.277,27.7 38.277,30.377 v2(38.3,30.4) ; v2(44.9,42.3) 44.9,43.475 44.937,43.512 44.937,44.987 R35.2 R47.1
  Bottom Layer w0.2: v2(38.3,30.4) 38.293,30.407 38.293,30.9 37.9,31.293 37.9,39 39.3,40.4 43.5,40.4 44.9,41.8 v2(44.9,42.3)
BUTTON_4: C31.2 R36.2 R49.1 U3.11 | length 31.2
  Top Layer w0.2: U3.11 37.237,26.037 38.9,27.7 v2(38.9,30.4) ; v2(48.9,42.3) 48.925,42.325 C31.2 48.937,43.512 48.937,44.987 R36.2 R49.1
  Bottom Layer w0.2: v2(38.9,30.4) 38.9,39.1 39.8,40 47.1,40 48.9,41.8 v2(48.9,42.3)
BUTTON_JK: C24.1 R29.2 R30.1 U3.20 | length 25.4
  Top Layer w0.2: R29.2 17.713,16.688 19.188,16.688 C24.1 19.212,16.688 20.687,16.688 20.825,16.55 37.45,16.55 38.882,17.982 U3.20
CAN_N: CAN.1 D1.1 R9.1 U1.7 | length 14.7
  Top Layer w0.2: U1.7 60.542,39.535 60.808,39.269 60.808,39.244 60.925,39.127 61.533,39.127 61.65,39.244 61.65,39.325 61.95,39.625 R9.1 62.05,39.625 62.35,39.325 62.35,39.244 62.467,39.127 62.939,39.127 63.683,39.127 63.8,39.244 ; D1.1 63.8,39.244 ; CAN.1 64.34,46.34 64.34,46.094 64.223,45.977 63.999,45.977 63.446,45.424 63.446,42.797 64.6,41.643 64.6,39.47 64.257,39.127 63.917,39.127 63.8,39.244
CAN_P: CAN.2 D1.2 R9.2 U1.6 | length 14.9
  Top Layer w0.2: U1.6 60.542,38.265 60.808,38.531 60.808,38.556 60.925,38.673 61.533,38.673 61.65,38.556 61.65,38.475 61.95,38.175 R9.2 62.05,38.175 62.35,38.475 62.35,38.556 62.467,38.673 63.127,38.673 63.683,38.673 63.8,38.556 ; D1.2 63.8,38.556 ; CAN.2 64.75,44.75 64.75,45.406 64.633,45.523 64.187,45.523 63.9,45.236 63.9,42.985 65.054,41.831 65.054,39.282 64.445,38.673 63.917,38.673 63.8,38.556
CAN_RX: U1.4 U3.44 | length 13.2
  Top Layer w0.2: U3.44 49.937,29.037 53.134,32.234 53.134,32.834 54.4,34.1 54.4,36.81 54.585,36.995 U1.4
CAN_TX: U1.1 U3.45 | length 16.5
  Top Layer w0.2: U3.45 49.737,29.537 52.559,32.359 52.559,32.959 53.7,34.1 53.7,40.155 54.35,40.805 U1.1
EXT_LED1: R10.2 U3.27 | length 15.8
  Top Layer w0.2: R10.2 30.4,14.35 31.8,15.75 37.85,15.75 42.363,20.263 42.363,21.543 U3.27
EXT_LED2: R11.2 U3.26 | length 20.5
  Top Layer w0.2: R11.2 25.1,14.35 26.9,16.15 37.65,16.15 41.863,20.363 41.863,21.543 U3.26
EXT_LED3: R12.2 U3.56 | length 35.2
  Top Layer w0.2: R12.2 19.013,14.488 20.488,14.488 v2(20.5,14.5) ; U3.56 41.391,33.003 41.391,26.109 v2(41.4,26.1)
  Bottom Layer w0.2: v2(20.5,14.5) 21.7,15.7 32.4,15.7 41.4,24.7 v2(41.4,26.1)
GND: BUT.5 C1.2 C2.1 C3.2 C4.1 C5.1 C6.2 C7.1 C8.1 C9.2 C10.1 C11.2 C12.1 C13.2 C14.2 C15.2 C16.2 C17.1 C18.1 C19.2 C20.1 C21.1 C22.2 C23.1 C24.2 C25.1 C26.1 C27.1 C28.1 C29.1 C30.1 C31.1 C32.1 C33.1 C34.1 C35.1 C36.1 C37.1 C38.1 C39.1 C40.1 C41.1 D1.3 I2C.4 J1.2 J1.4 J1.6 J1.8 Joystick.1 PS1.2 PT1.1 PT2.1 PWR.1 Q1.2 Q2.2 Q3.2 R3.1 R8.2 R13.1 R16.1 R19.1 R20.1 R25.2 R37.1 R42.1 R63.1 R64.1 SW1.4 SW2.3 SW3.4 SW4.3 SWD.1 U1.2 U2.1 U3.12 U3.18 U3.63 UART.4 | length 553.7
  Top Layer w0.3: C21.1 31.8,23.263 34.074,25.537 U3.12 36.189,25.537 37.882,23.844 U3.18 37.882,20.78 36.952,19.85 36.85,19.85 36.6,19.6 C14.2 ; C9.2@35.3,36 34,34.7 34,33 35.063,31.937 37.589,31.937 37.882,32.23 U3.63
  Top Layer w0.4: PT1.1 11.172,28.5 ; 11.3,34.875 11.3,31.943 11.843,31.4 13.1,31.4 13.7,30.8 C37.1 13.8,29.395 ; Joystick.1 15.343,20.5 ; R63.1 16.75,28.3 15.655,29.395 13.8,29.395 ; C24.2 19.1,18.1 17.8,19.4 16.443,19.4 15.343,20.5 ; R42.1 21.35,21.65 20.3,22.7 18.4,22.7 ; R37.1 21.35,25.25 20.6,26 16.05,26 15.421,25.371 ; 24.375,35.7 24.375,28.425 25.6,27.2 ; R16.1 27.4,13.3 27.15,13.05 27,13.05 26.9,12.95 Q1.2 26.9,12.593 26.1,12.593 25.357,11.85 22.3,11.85 21.6,12.55 Q2.2 21.6,12.95 21.7,13.05 21.85,13.05 22.1,13.3 R19.1 22.1,14.4 21.325,15.175 16.65,15.175 15.85,14.375 R20.1 15.85,13.275 15.6,13.025 15.45,13.025 15.35,12.925 Q3.2 15.35,12.525 13.856,11.031 J1.2 J1.4 J1.6 J1.8 ; C12.1 C13.2 ; C18.1 C21.1 C6.2 30.4,21.9 29.3,20.8 25.7,20.8 24.8,21.7 24.8,26.4 25.6,27.2 ; C17.1 31.6,26.6 30.1,25.1 27.7,25.1 25.6,27.2 ; C40.1 34.4,10.35 33.85,9.8 33.85,9.793 32.657,8.6 30.903,8.6 27.7,5.397 27.7,3.8 ; C9.2 35.3,36 34.6,36.7 34.6,37.675 R25.2 34.325,37.95 34.325,38.675 32.6,40.4 32.8,40.6 32.8,40.675 35.525,43.4 36.075,42.85 36.075,42.025 36.9,41.2 39.6,41.2 ; C9.2@35.7,36 36.1,36.4 C11.2 ; C38.1 37.4,10.35 36.85,9.8 36.85,9.793 34.657,7.6 31.934,7.6 30.2,5.866 30.2,3.8 ; 37.882,23.844 45.156,23.844 ; C27.1 39.6,43.425 39.6,41.2 ; C36.1 40.5,7 SW1.4 ; C33.1 43.5,8.8 42.25,7.55 42.25,3.8 ; C29.1 43.525,41.225 43.5,41.2 ; C19.2 46.3,18.2 47.7,19.6 C15.2 47.7,21.3 45.156,23.844 ; C30.1 46.5,8.9 44.8,7.2 44.8,3.8 ; C16.2 47.3,33.5 46.4,33.5 45.7,32.8 45.7,32.477 45.156,31.933 45.156,23.844 ; C31.1 47.525,41.959 46.766,41.2 43.5,41.2 ; R3.1 48.2,36.55 48,36.35 48,36.3 47.55,35.85 47.55,33.75 48.95,33.75 C2.1 C22.2 ; C28.1 49.5,3.8 ; C41.1 52.6,10.35 52.8,10.15 52.8,9.397 56.7,5.497 56.7,3.917 56.583,3.8 ; C39.1 55.6,10.35 56.15,9.8 56.15,9.35 60.333,5.167 ; C32.1 57.5,20.5 I2C.4 62.132,18.868 63.323,18.868 66.225,15.966 66.225,13.583 ; C34.1 60.779,10.35 64.129,13.7 66.108,13.7 66.225,13.583 ; R8.2@60.725,34.95 R8.2 ; J1.8 2.3,12.779 2.3,20.997 5.803,24.5 13,24.5 14.646,26.146 ; J1.8 4.258,10.821 4.258,10.044 10.503,3.8 22.8,3.8 SW3.4 25.2,3.8 27.7,3.8 ; 11.172,28.5 12.067,29.395 13.8,29.395 ; 11.172,28.5 11.172,28.171 11.843,27.5 12.957,27.5 13.1,27.5 13.7,26.9 C35.1 13.9,26.9 14.45,26.35 14.45,26.343 14.646,26.146 ; 14.646,26.146 15.421,25.371 ; 15.343,20.5 15.843,21 17.557,21 17.7,21 18.3,21.6 C25.1 18.4,22.7 ; 15.421,25.371 16.393,24.4 17.557,24.4 17.7,24.4 18.3,23.8 C23.1 18.4,22.7 ; 27.7,3.8 30.2,3.8 ; 30.2,3.8 37.3,3.8 SW1.4 ; SW1.4 39.7,3.8 42.25,3.8 ; 39.6,41.2 43.5,41.2 ; 42.25,3.8 44.8,3.8 ; 44.8,3.8 49.5,3.8 ; 49.5,3.8 51.8,3.8 SW4.3 54.2,3.8 56.583,3.8 ; 56.583,3.8 58.966,3.8 60.333,5.167 ; 60.333,5.167 65.025,9.859 SW2.3 66.225,11.2 66.225,13.583
  Top Layer w0.5: PWR.1 13,44 ; C10.1 C5.1@25.475,40.471 ; C5.1 C5.1@25.475,40.471 ; C20.1 32.9,30.7 27.9,35.7 ; C26.1 35.525,43.6 35.375,43.75 35.275,43.75 34.4,44.625 34.4,48.4 ; BUT.5 48,52.5 ; U1.2 U1.2@55.2,39.535 ; UART.4 61,28 67.607,28 67.9,28.293 67.9,31.907 67.607,32.2 65.8,32.2 63,35 ; R8.2@60.725,34.95 59.575,33.8 58.8,33.8 57.7,34.9 C1.2 57.7,37.035 U1.2@55.2,39.535 ; R8.2 63,35 ; D1.3 66.193,38.9 66.143,38.85 66.143,38.143 63,35 ; 13,44 13.05,43.95 C8.1 13.05,40.8 12.775,40.525 12.525,40.525 PT2.1 10.125,34.875 11.3,34.875 12.9,34.875 C7.1 13.025,34.8 14.387,33.437 15.513,33.437 16.75,32.2 R64.1 16.85,32.2 20.025,35.375 20.025,35.45 20.275,35.7 U2.1 24.375,35.7 27.9,35.7 ; 13,44 14.8,44 19.8,49 C3.2 21.2,49.2 C4.1 27.489,49.2 28.229,48.46 PS1.2 34.34,48.46 34.4,48.4 ; C5.1@25.475,40.471 25.75,40.196 26.404,40.196 27.4,39.2 27.9,39.2 28.05,39.05 R13.1 28.05,37.995 28.325,37.72 28.325,36.125 27.9,35.7 ; 34.4,48.4 34.4,50.1 36.8,52.5 48,52.5 ; 48,52.5 SWD.1 56.75,51.25 56.75,41.085 U1.2@55.2,39.535
LED1: D3.2 U3.58 | length 2.1
  Top Layer w0.3: D3.2 40.25,34.75 40.25,34.319 40.382,34.187 U3.58
LED2: D4.2 U3.59 | length 4.1
  Top Layer w0.3: U3.59 39.882,33.882 39.25,34.514 39.25,35.75 D4.2
LED3: D5.2 U3.61 | length 5.6
  Top Layer w0.3: U3.61 38.882,34.174 38.75,34.306 38.75,36.75 D5.2
NetBUT_1: BUT.1 R33.1 | length 7
  Top Layer w0.2: R33.1 35.5,45.05 38,47.55 BUT.1
NetBUT_2: BUT.2 R34.1 | length 6.4
  Top Layer w0.2: R34.1 39.5,45.05 40.5,46.05 BUT.2
NetBUT_3: BUT.3 R35.1 | length 6.2
  Top Layer w0.2: BUT.3 43,45.5 43.15,45.35 43.2,45.35 43.5,45.05 R35.1
NetBUT_4: BUT.4 R36.1 | length 6.9
  Top Layer w0.2: BUT.4 45.5,47 47.15,45.35 47.2,45.35 47.5,45.05 R36.1
NetC23_2: C23.2 L1.2 R31.1 | length 2.9
  Top Layer w0.25: L1.2 R31.1
NetC25_2: C25.2 L2.2 R32.1 | length 2.9
  Top Layer w0.25: L2.2 R32.1
NetC35_2: C35.2 L3.2 R59.1 | length 2.9
  Top Layer w0.25: L3.2 C35.2 R59.1
NetC37_2: C37.2 L4.2 R60.1 | length 2.9
  Top Layer w0.25: L4.2 R60.1
NetD2_2: D2.2 R13.2 | length 1.5
  Top Layer w0.2: R13.2 D2.2
NetD3_1: D3.1 R26.1 | length 1.3
  Top Layer w0.3: D3.1 R26.1
NetD4_1: D4.1 R27.1 | length 1.4
  Top Layer w0.3: D4.1 R27.1
NetD5_1: D5.1 R28.1 | length 1.4
  Top Layer w0.3: D5.1 R28.1
NetI2C_2: I2C.2 R15.1 R17.1 | length 11.9
  Top Layer w0.2: R15.1 R17.1 59.5,26.5 I2C.2
NetI2C_3: I2C.3 R14.1 R18.1 | length 8.1
  Top Layer w0.2: R18.1 R14.1 60,23.5 I2C.3
NetJoystick_2: Joystick.2 L2.1 | length 7
  Top Layer w0.25: Joystick.2 12.8,22.3 16.5,22.3 16.675,22.125 16.675,22.075 16.95,21.8 L2.1
NetJoystick_3: Joystick.3 L1.1 | length 9.8
  Top Layer w0.25: Joystick.3 11,23 16.35,23 16.95,23.6 L1.1
NetJoystick_4: Joystick.4 R29.1 | length 12.7
  Top Layer w0.2: Joystick.4 7.9,18.6 16.593,18.6 16.868,18.325 17.5,18.325 R29.1
NetL3_1: L3.1 PT1.2 | length 7.3
  Top Layer w0.25: PT1.2 8,26.5 12.2,26.5 L3.1
NetL4_1: L4.1 PT2.2 | length 8.8
  Top Layer w0.25: PT2.2 11.625,30.875 12.125,30.875 L4.1
NetLED_1: LED.1 R22.1 | length 14
  Top Layer w0.4: LED.1 20.1,6.6 25.422,6.6 28.947,10.125 R22.1
NetLED_2: LED.2 R23.1 | length 10.9
  Top Layer w0.4: LED.2 16.032,5 19.132,8.1 21.8,8.1 23.15,9.45 R23.1
NetLED_3: LED.3 R24.2 | length 7.4
  Top Layer w0.4: LED.3 13.65,5 18.75,10.1 R24.2
NetQ1_1: Q1.1 R10.1 R16.2 | length 3.2
  Top Layer w0.2: R16.2 28.8,14.3 Q1.1 28.938,12.887 30.338,12.887 R10.1
NetQ1_3: Q1.3 R22.2 | length 3.1
  Top Layer w0.4: Q1.3 27.85,10.55 28.875,11.575 R22.2
NetQ2_1: Q2.1 R11.1 R19.2 | length 3.2
  Top Layer w0.2: R19.2 23.5,14.3 Q2.1 23.638,12.887 25.038,12.887 R11.1
NetQ2_3: Q2.3 R23.2 | length 2.9
  Top Layer w0.4: Q2.3 22.55,10.55 22.9,10.9 R23.2
NetQ3_1: Q3.1 R12.1 R20.2 | length 3.2
  Top Layer w0.2: R20.2 17.25,14.275 Q3.1 17.35,12.825 R12.1
NetQ3_3: Q3.3 R24.1 | length 3.1
  Top Layer w0.4: Q3.3 16.3,10.525 17.325,11.55 R24.1
NetR1_1: R1.1 UART.2 | length 9.7
  Top Layer w0.2: R1.1 56.2,31 57.2,32 62,32 UART.2
NetR2_1: R2.1 UART.3 | length 7.3
  Top Layer w0.2: R2.1 56.2,29.5 58,31.3 60.2,31.3 UART.3
NetR3_2: R3.2 R7.1 SWD.2 | length 16.5
  Top Layer w0.2: R7.1 R3.2 ; R3.2@48.3,38 52.6,42.3 52.6,47.1 SWD.2
NetR5_1: R5.1 R6.1 SWD.3 | length 13.4
  Top Layer w0.2: R5.1 R6.1 ; R5.1@49.8,38 50.1,38.3 50.1,38.35 53.4,41.65 53.4,45.4 SWD.3
NetR8_1: R8.1 U1.8 | length 6.7
  Top Layer w0.2: R8.1@59.1,35 59.1,35.225 58.9,35.425 58.9,39.905 59.8,40.805 U1.8
NetR38_1: R38.1 SW1.1 | length 6.1
  Top Layer w0.2: SW1.1 46.2,5.2 46.2,7.2 48,9 R38.1
NetR39_1: R39.1 SW1.2 | length 5.9
  Top Layer w0.2: SW1.2 43.5,7.2 45,8.7 R39.1
NetR40_1: R40.1 SW1.3 | length 5.7
  Top Layer w0.2: SW1.3 41,7.395 42,8.395 R40.1
NetR45_1: R45.1 SW2.1 | length 11.2
  Top Layer w0.2: R45.1 55.525,18.95 59.475,15 SW2.1
NetR46_1: R46.1 SW2.2 | length 9.8
  Top Layer w0.2: R46.1 57.05,10.3 58.15,9.2 61.725,9.2 SW2.2
NetR53_1: R53.1 SW3.1 | length 9.7
  Top Layer w0.2: SW3.1 33.2,6.7 35.35,6.7 38.95,10.3 R53.1
NetR54_1: R54.1 SW3.2 | length 9.5
  Top Layer w0.2: SW3.2 29.268,5.268 29.268,5.768 31.6,8.1 33.75,8.1 35.95,10.3 R54.1
NetR55_1: R55.1 SW3.3 | length 8.9
  Top Layer w0.2: SW3.3 26.5,5.379 30.221,9.1 31.8,9.1 32.65,9.95 32.65,10 32.95,10.3 R55.1
NetR56_1: R56.1 SW4.1 | length 7
  Top Layer w0.2: R56.1 54,9 SW4.1
NetR57_1: R57.1 SW4.2 | length 7.2
  Top Layer w0.2: R57.1 51,9.5 SW4.2
NRST: C6.1 R21.2 U3.7 | length 10.9
  Top Layer w0.2: R21.2 C6.1 ; C6.1@29,22.1 31.1,24.2 32,24.2 34.1,26.3 34.1,27.6 34.537,28.037 U3.7
OSC_IN: C20.2 U3.5 Y1.2 | length 7.4
  Top Layer w0.2: Y1.2 31.8,29.3 C20.2 33.96,29.3 34.223,29.037 U3.5
OSC_OUT: C17.2 U3.6 Y1.1 | length 6.8
  Top Layer w0.2: Y1.1 30.18,28 C17.2 33.864,28 34.401,28.537 U3.6
SCL: R17.2 U3.41 | length 7.6
  Top Layer w0.2: U3.41 50.086,27.537 51.123,26.5 R17.2
SDA: R18.2 U3.40 | length 8
  Top Layer w0.2: U3.40 48.663,27.037 50.7,25 R18.2
SW1_P2_1: C32.2 R45.2 R50.1 U3.39 | length 11.9
  Top Layer w0.2: U3.39 47.963,26.537 52.45,22.05 54,22.05 R50.1 C32.2@54.05,20.7 ; R45.2 54.087,19.012 54.087,20.487 C32.2
SW1_P2_2: C34.2 R46.2 R52.1 U3.38 | length 23.7
  Top Layer w0.2: U3.38 46.876,26.018 47.85,26.018 50.4,23.468 50.4,18 51.758,16.642 56.008,16.642 58.5,14.15 R52.1 C34.2 R46.2
SW1_P3_1: C28.2 R38.2 R44.1 U3.35 | length 15.8
  Top Layer w0.2: U3.35 46.876,24.518 47.653,24.518 49.2,22.971 49.2,17.434 49.5,17.134 C28.2 R38.2
SW1_P3_2: C30.2 R39.2 R48.1 U3.34 | length 16.1
  Top Layer w0.2: R39.2 46.4,11.75 C30.2 46.4,11.85 R48.1@46.4,14.15 ; R48.1 46.4,15.1 48.8,17.5 48.8,22.805 47.588,24.018 46.876,24.018 U3.34
SW1_P3_3: C33.2 R40.2 R51.1 U3.33 | length 16.3
  Top Layer w0.2: R40.2 C33.2 43.5,14.15 43.8,14.45 43.85,14.45 48.4,19 48.4,22.569 47.432,23.537 U3.33
SW2_P2_1: C39.2 R56.2 R62.1 U3.37 | length 21.1
  Top Layer w0.2: U3.37 46.876,25.518 47.785,25.518 50,23.302 50,17.834 51.692,16.142 54.558,16.142 55.5,15.2 R62.1 ; R56.2 C39.2 R62.1@55.5,14.15
SW2_P2_2: C41.2 R57.2 R66.1 U3.36 | length 17.6
  Top Layer w0.2: U3.36 46.876,25.018 47.719,25.018 49.6,23.137 49.6,17.6 52.467,14.733 52.467,14.133 R66.1 C41.2 R57.2
SW2_P3_1: C36.2 R53.2 R58.1 U3.30 | length 12.7
  Top Layer w0.2: R53.2 C36.2 R58.1 40.5,16.4 43.882,19.782 U3.30
SW2_P3_2: C38.2 R54.2 R61.1 U3.29 | length 13.7
  Top Layer w0.2: R54.2 C38.2 R61.1 37.5,14.15 43.363,20.013 43.363,21.543 U3.29
SW2_P3_3: C40.2 R55.2 R65.1 U3.28 | length 16.2
  Top Layer w0.2: R55.2 C40.2 R65.1 34.5,14.15 35.65,15.3 38,15.3 42.882,20.182 U3.28
SWCLK: R7.2 U3.49 | length 4.3
  Top Layer w0.2: U3.49 44.882,33.587 46.5,35.205 46.5,36.3 R7.2
SWDIO: R6.2 U3.46 | length 9.8
  Top Layer w0.2: U3.46 49.303,30.037 51.25,31.984 R6.2
UART_RX: R1.2 R4.1 U3.43 | length 9.7
  Top Layer w0.2: U3.43 50.537,28.537 53,31 R1.2 R4.1
UART_TX: R2.2 U3.42 | length 7.8
  Top Layer w0.2: U3.42 50.637,28.037 52.1,29.5 R2.2
VBAT: C12.2 C13.1 D6.2 U3.1 | length 11.6
  Top Layer w0.3: 33.2,32.669 34.832,31.037 U3.1
  Top Layer w0.4: 33.2,32.669 33.2,33.6
  Top Layer w0.5: C12.2@30.9,38.9 30.925,38.9 30.975,38.85 D6.2 30.975,36.85 33.2,34.625 33.2,33.6 ; C12.2 C13.1
VCAP1: C19.1 U3.31 | length 2.2
  Top Layer w0.3: 44.382,20.5 U3.31
  Top Layer w0.4: 44.382,20.5 44.382,20.018 44.8,19.6 C19.1@44.8,19.5
VCAP2: C22.1 U3.47 | length 2.3
  Top Layer w0.3: U3.47 47.863,30.537
  Top Layer w0.4: 47.863,30.537 48.437,30.537 48.9,31 C22.1
VDDA: C18.2 C21.2 FB1.1 U3.13 | length 7.6
  Top Layer w0.3: 33.708,24.392 33.708,24.4 34.344,25.037 U3.13
  Top Layer w0.4: FB1.1 33.2,19.1 33.2,19.396 33.161,19.434 33.161,20.461 C18.2 33.2,23.885 33.708,24.392
pads on no net: U1.5 U3.2 U3.3 U3.4 U3.21 U3.22 U3.23 U3.24 U3.25 U3.50 U3.51 U3.52 U3.53 U3.54 U3.55 U3.57 U3.62

## Polygon pours and split planes (outlines as drawn)
3.3V on Bottom Layer "NONET_L02_P-001" (solid, pour order 0): 0,56 0,0 70,0 70,56
GND on Top Layer "NONET_L02_P-001" (solid, remove dead copper, pour order 4): 0,56 0,0 70,0 70,56
5V on Top Layer "33" (solid, pour order 3): 27.5,46.6 27.8,46.9 29.2,46.9 29.5,46.6 29.5,45 29.2,44.7 29.2,43 28.3,42.1 24.3,42.1 24,41.8 24,41.4 24.3,41.1 24.3,39.9 24,39.6 19.8,39.6 19.6,39.8 19.6,40.8 19.8,41 22.5,41 22.9,41.4 22.9,42.2 23.9,43.2 27.4,43.2 27.8,43.6 27.8,44.7 27.5,45
5-24V on Top Layer "NONET_L02_P-001" (solid, pour order 2): 29.2,51.9 29.4,51.7 29.4,50.3 29.2,50.1 23.9,50.1 23.6,50.4 17.6,50.4 15,47.8 10,47.8 7.7,45.5 4.2,45.5 4,45.7 4,47.3 4.2,47.5 5.8,47.5 7.1,47.5 9.8,50.2 14.5,50.2 16.6,52.3 25.3,52.3 25.7,51.9

## Silkscreen, mask and mechanical layers (free items; w line width, h text height)
Top Overlay:
  lines w0.2: 1.127,12.301 2.778,12.301 ; 2.778,9.761 1.127,9.761 1.127,14.841 2.778,14.841
  text "GND" at 50.25,54.486 h1.25 r180
  text "B1" at 37.5,54.475 h1.25 r180
  text "B2" at 40.5,54.475 h1.25 r180
  text "B3" at 43.5,54.475 h1.25 r180
  text "B4" at 46.5,54.475 h1.25 r180
  text "GND" at 58.986,52 h1.25 r90
  text "CLK" at 59,49.5 h1.25 r90
  text "PWR" at 1.345,48.543 h1.5 r270
  text "H" at 68.475,47.25 h1.5 r90
  text "DIO" at 59,46 h1.25 r90
  text "GND" at 1.314,44.732 h1.5 r270
  text "L" at 68.475,43.75 h1.5 r90
  text "3V3" at 58.986,43.5 h1.25 r90
  text "S" at 5.5,33.025 h1.25
  text "5V" at 2,33.014 h1.25
  text "GND" at 8,33.014 h1.25
  text "GND" at 57,26.514 h1.25
  text "3V3" at 66,26.514 h1.25
  text "TX" at 60.5,26.5 h1.25
  text "RX" at 63.5,26.5 h1.25
  text "5V" at 2,25.014 h1.25
  text "S" at 5.5,25.025 h1.25
  text "GND" at 8,25.014 h1.25
  text "SDA" at 60,18.514 h1.25
  text "SCL" at 63,18.514 h1.25
  text "5V" at 66.5,18.514 h1.25
  text "GND" at 57,18.5 h1.25
  text "5V" at 2,17.014 h1.25
  text "BUT" at 4.5,17.014 h1.25
  text "GND" at 13.5,17.014 h1.25
  text "A" at 8.5,17 h1.25
  text "B" at 11.5,17 h1.25
  text "S1" at 68.5,15 h1.25 r90
  text "3V3" at 1.616,14.518 h1.25 r270
  text "GND" at 1.616,12.232 h1.25 r270
  text "S2" at 68.5,11.75 h1.25 r90
  text "GND" at 68.375,8.248 h1.25 r90
  text "GND" at 36.633,1.595 h1.25
  text "GND" at 51.01,1.567 h1.25
  text "S3" at 25.75,1.525 h1.25
  text "S2" at 28.75,1.525 h1.25
  text "S1" at 31.75,1.525 h1.25
  text "S3" at 40.25,1.525 h1.25
  text "S2" at 43.25,1.525 h1.25
  text "S1" at 46.25,1.525 h1.25
  text "S2" at 54.75,1.525 h1.25
  text "S1" at 58,1.525 h1.25
  text "3V3" at 9.1,1.514 h1.25
  text "LED3" at 11.9,1.514 h1.25
  text "LED2" at 14.9,1.5 h1.25
  text "LED1" at 18.1,1.5 h1.25
  text "GND" at 22.132,1.418 h1.25
Mechanical 1:
  the board outline again, w0.2